# EAGLE board stm32f103c8t6_tft_mcp6s92 (EAGLE 9.3.0)
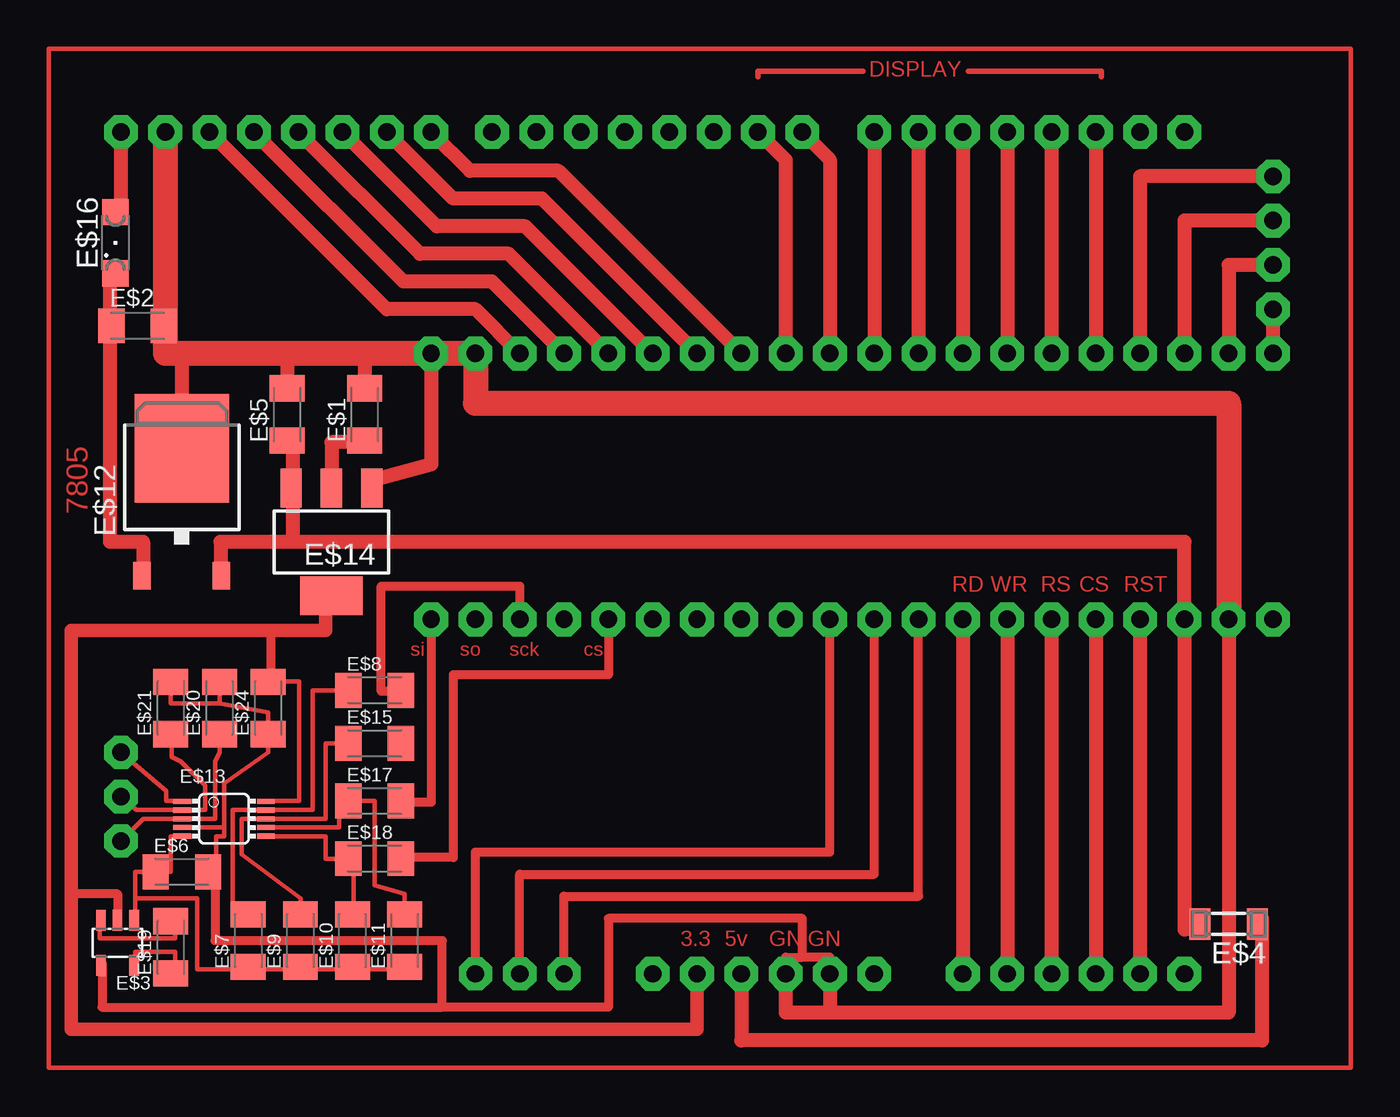
[diagram p0: board, top side]
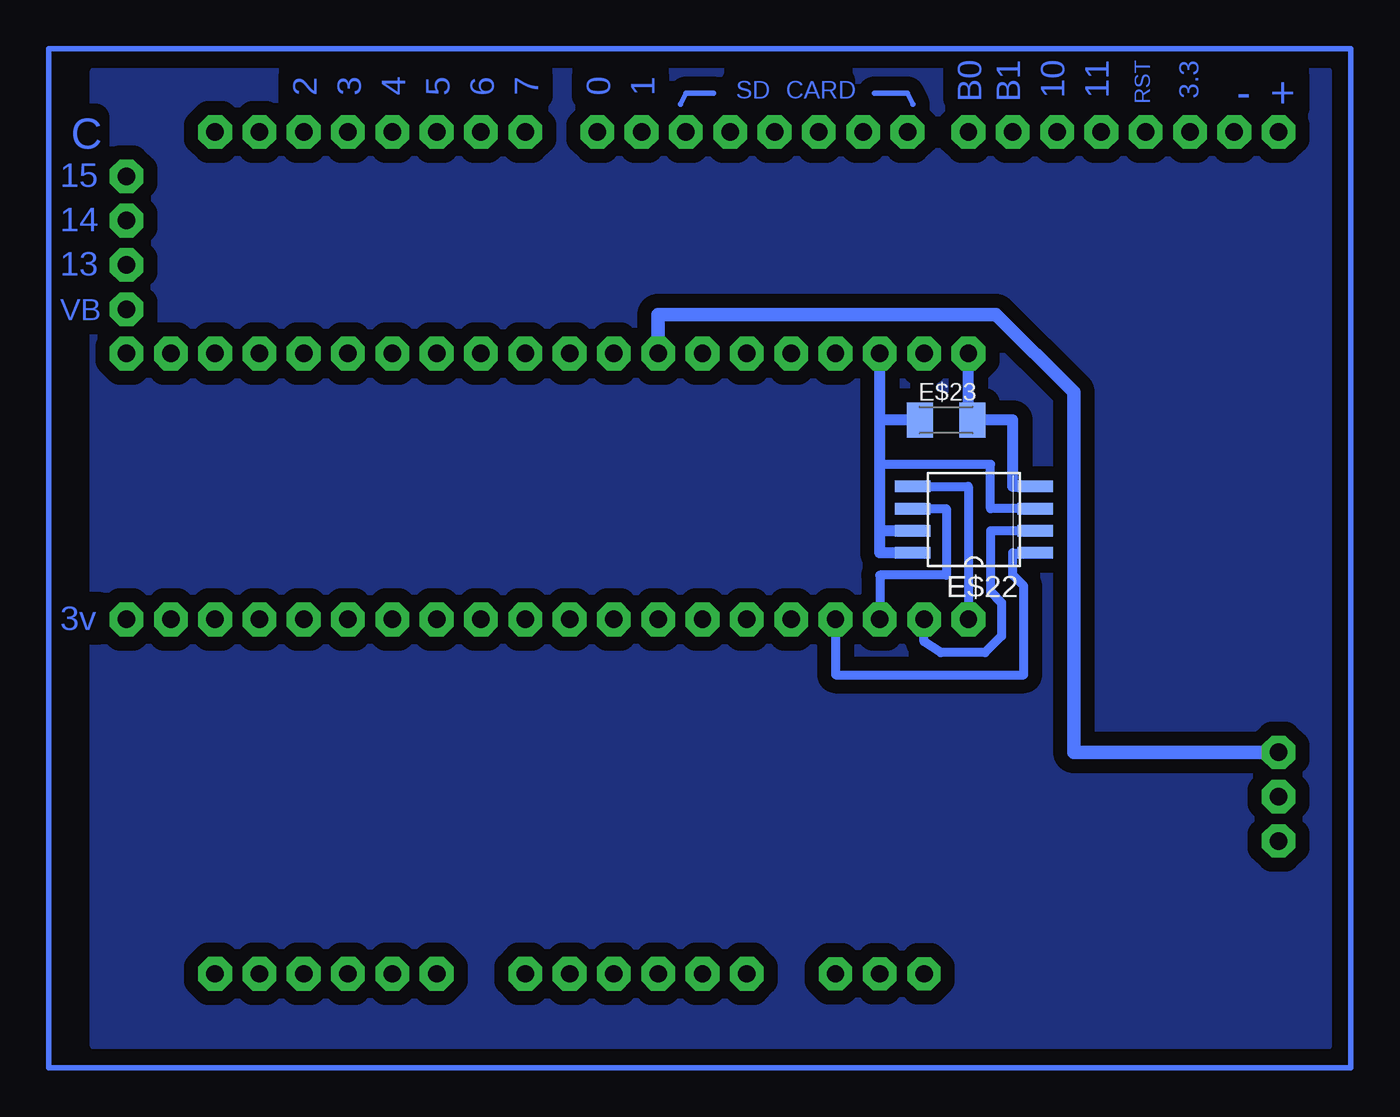
[diagram p1: board, bottom side, seen from below]

No outline drawn. Coordinates in mm, seen from the top.
Copper layers (1*16): Top 0.035mm / dielectric 1.5mm / Bottom 0.035mm
Design rules "default": minimum track width 10mil, minimum drill 24mil, track to track 8mil, track to pad 8mil, pad to pad 8mil, via to via 8mil, smd to smd 8mil, copper to edge 40mil, drill to drill 8mil, minimum pad ring 10mil, minimum via ring 8mil, stop-mask expansion 4mil, vias tented up to drill 0mil, thermal gap 10mil

## Footprints (pad centres in the part's own frame; a part is rotated, then mirrored left to right if it is on the bottom)
C1206K = smd 1.5 x 2: 1 -1.5,0; 2 1.5,0
SOT23-5 = smd 0.55 x 1.2: 1 -0.95,-1.3; 2 0,-1.3; 3 0.95,-1.3; 4 0.95,1.3; 5 -0.95,1.3
SM-1206 = smd 1.2 x 1.8: 1 -1.65,0; 2 1.65,0
TO252 = smd 1 x 1.6: 1 -2.28,-4.8; 2 2.28,-4.8 | smd 5.4 x 6.2: 3 0,2.5
MSOP10 = smd 0.3 x 1.02: 1 -1,-2.4; 2 -0.5,-2.4; 3 0,-2.4; 4 0.5,-2.4; 5 1,-2.4; 6 1,2.4; 7 0.5,2.4; 8 0,2.4; 9 -0.5,2.4; 10 -1,2.4
SOT223 = smd 1.219 x 2.235: 1 -2.311,-3.099; 2 0,-3.099; 3 2.311,-3.099 | smd 3.6 x 2.2: 4 0,3.099
SML1206 = smd 1.5 x 1.5: A 1.75,0; C -1.75,0
SO08-208 = smd 0.66 x 2.032: 1 -1.905,-3.498; 2 -0.635,-3.498; 3 0.635,-3.498; 4 1.905,-3.498; 5 1.905,3.498; 6 0.635,3.498; 7 -0.635,3.498; 8 -1.905,3.498

## Placement (x,y rotation side)
E$1  [C1206K]  18.41,37.78 90 top
E$2  [C1206K]  5.4,42.86 0 top
E$3  tps60  [SOT23-5]  4.25,7.49 180 top
E$4  [SM-1206]  67.94,8.57 180 top
E$5  [C1206K]  13.97,37.78 90 top
E$6  1m  [C1206K]  7.94,11.56 0 top
E$7  3k  [C1206K]  11.75,7.62 90 top
E$8  1k  [C1206K]  18.99,21.97 0 top
E$9  3k  [C1206K]  14.73,7.62 90 top
E$10  3k  [C1206K]  17.72,7.62 90 top
E$11  3k  [C1206K]  20.7,7.62 90 top
E$12  [TO252]  7.94,33.34 0 top
E$13  mcp6s93  [MSOP10]  10.35,14.61 270 top
E$14  [SOT223]  16.51,30.48 180 top
E$15  1k  [C1206K]  18.99,18.92 0 top
E$16  [SML1206]  4.13,47.62 90 top
E$17  1k  [C1206K]  18.99,15.62 0 top
E$18  1k  [C1206K]  18.99,12.32 0 top
E$19  1m  [C1206K]  7.3,7.24 90 top
E$20  4k7  [C1206K]  10.1,20.95 90 top
E$21  470k  [C1206K]  7.3,20.95 90 top
E$22  [SO08-208]  21.91,31.75 90 bottom
E$23  [C1206K]  23.5,37.47 0 bottom
E$24  1m  [C1206K]  12.89,20.95 90 top

## Library data of the parts
E$1 E$2 E$5 E$12 = adafruit
E$3 = v-reg-micrel
E$4 = inductor-neosid
E$6-E$11 E$15 E$17-E$21 E$24 = rcl
E$13 = linear
E$14 = transistor-pnp
E$16 = led
E$22 = maxim
E$23 = ref-packages-longpad

## Tracks (layer width: path | path; a pad name or v marks a point on that pad's centre or on a via)
S$1  (via drill 1 pad 1.93)
  Top 0.813: v60.33,53.98 v60.33,41.27
S$2  (via drill 1 pad 1.93)
  Top 0.813: v57.78,53.98 v57.78,41.27
S$3  (via drill 1 pad 1.93)
  Top 0.813: v55.24,53.98 v55.24,41.27
S$4  (via drill 1 pad 1.93)
  Top 0.813: v50.16,53.98 v50.16,41.27
S$5  (via drill 1 pad 1.93)
  Top 0.813: v47.62,53.98 v47.62,41.27
S$6  (via drill 1 pad 1.93)
  Top 0.813: v45.09,41.27 45.09,52.39 v43.5,53.98
S$7
  Top 0.813: 62.87,26.04 62.87,5.71
S$8
  Top 0.813: 60.33,26.04 60.33,5.71
S$9
  Top 0.813: 57.78,26.04 57.78,5.71
S$10
  Top 0.813: 55.24,26.04 55.24,5.71
S$11
  Top 0.813: 52.7,26.04 52.7,5.71
S$12  (via drill 1 pad 1.93)
  Top 0.508: 13.02,25.4 13.02,22.86
  Top 0.762: v37.47,5.71 37.47,2.54 1.59,2.54 1.59,25.4 13.02,25.4 16.19,25.4 16.19,27.94
S$13
  Top 0.813: 3.81,45.72 3.81,30.48 5.71,30.48 5.71,28.26
S$14  (via drill 1 pad 1.93)
  Top 0.813: v42.55,41.27 42.55,52.39 v40.96,53.98
S$15  (via drill 1 pad 1.93)
  other vias: 65.41,53.98
S$16
  Top 0.813: 16.51,33.66 16.51,36.2 18.41,36.2
S$17
  Top 0.25: 14.67,22.48 14.67,15.62 12.64,15.62
  Top 0.254: 12.89,22.23 12.89,22.48 14.67,22.48
S$18
  Bottom 0.305: 27.62,56.2 25.72,56.2 25.4,55.56
S$19
  Top 0.813: 7.94,41.27 7.94,36.51
S$20
  Bottom 0.305: 36.83,56.2 38.42,56.2 38.73,55.56
S$21  (via drill 1 pad 1.93)
  Top 0.813: v52.7,53.98 v52.7,41.27
S$22  (via drill 1 pad 1.93)
  Top 0.813: v12.06,53.98 20.64,45.4 25.72,45.4 v29.84,41.27
S$23  (via drill 1 pad 1.93)
  Top 0.813: v14.61,53.98 21.59,46.99 26.67,46.99 v32.38,41.27
S$24
  pour Bottom (isolate 0.813): 1.59,1.59 72.39,1.59 72.39,57.47 1.59,57.47
S$25  (via drill 1 pad 1.93)
  Top 0.813: 66.36,8.26 65.41,8.26 v65.41,26.04 65.41,30.48 14.29,30.48 | 14.29,36.2 14.29,30.48 | 14.29,30.48 10.16,30.48 10.16,28.26
S$26
  Bottom 0.305: 74.93,58.74 74.93,0.32 0.32,0.32 0.32,58.74 74.93,58.74
S$27  (via drill 1 pad 1.93)
  Top 0.813: v27.3,41.27 24.77,43.81 19.68,43.81 v9.53,53.98
  Bottom 0.508: 27.3,34.92 20.95,34.92 20.95,32.38 17.78,32.38
  Bottom 0.635: 25.08,29.84 27.3,29.84 27.3,31.11 | 25.08,31.11 27.3,31.11 | 27.3,31.11 27.3,34.92 27.3,37.47 | 27.3,37.47 v27.3,41.27 | 24.77,37.47 27.3,37.47
S$28  (via drill 1 pad 1.9)
  Top 0.254: 7.37,19.49 7.37,18.16 7.87,17.91 9.27,16.51 9.27,15.11 5.33,15.11 v4.45,15.88
S$29  (via drill 1 pad 1.93)
  Top 0.508: 9.84,11.43 9.84,7.62 22.86,7.62 22.86,3.81 | v45.09,5.71 45.09,6.67 43.5,6.67 | v42.55,5.71 42.55,6.67 43.5,6.67 | 43.5,6.67 43.5,8.89 32.38,8.89 32.38,3.81 22.86,3.81 | 3.37,6.35 3.37,3.81 22.86,3.81
  Top 0.813: 18.73,33.02 18.73,33.97 22.23,34.92 v22.23,41.27 | v67.94,26.04 67.94,3.49 45.09,3.49 | v45.09,5.71 45.09,3.49 | 45.09,3.49 42.55,3.49 v42.55,5.71 | 13.97,41.27 13.97,39.05 | 18.41,41.27 18.41,39.05
  Top 1.422: v67.94,26.04 67.94,38.42 24.77,38.42 v24.77,41.27 v22.23,41.27 18.41,41.27 13.97,41.27 6.99,41.27 v6.99,53.98
  Bottom 0.635: 18.1,33.66 19.68,33.66 19.68,37.47 22.23,37.47 v22.23,41.27
S$30
  Top 0.254: 16.7,21.97 15.43,21.97 15.43,15.11 10.86,15.11 10.86,8.76
S$31
  Top 0.254: 14.73,8.83 14.73,10.03 11.37,12.57 11.37,14.61 16.19,14.61 16.19,18.92 16.7,18.92
S$32
  Top 0.254: 20.7,8.83 20.7,10.29 18.99,10.79 18.99,15.62 16.95,15.62 16.95,14.1 12.64,14.1
S$33
  Top 0.305: 40.96,57.15 40.96,57.47 46.99,57.47
S$34  (via drill 1 pad 1.93)
  Top 0.813: v4.45,53.98 4.45,49.53
S$35
  Top 0.305: 53.02,57.47 60.64,57.47 60.64,57.15
S$36
  Top 0.254: 7.56,8.26 7.56,7.75 3.24,7.75 3.24,9.02
S$37
  Top 0.254: 5.27,6.22 5.27,6.99 7.56,6.99 7.56,5.46
S$39  (via drill 1 pad 1.93)
  Bottom 0.508: v29.84,26.04 29.84,22.86 19.05,22.86 19.05,27.94 19.68,28.57 19.68,29.84 17.78,29.84
S$40  (via drill 1 pad 1.93)
  Top 0.508: v22.23,26.04 22.23,15.56 20.32,15.56
  Bottom 0.508: 26.04,33.66 22.23,33.66 v22.23,26.04
S$41  (via drill 1 pad 1.93)
  Top 0.508: 20.64,21.91 19.37,21.91 19.37,27.94 27.3,27.94 v27.3,26.04
  Bottom 0.508: 26.04,32.38 23.5,32.38 23.5,28.57 27.3,28.57 v27.3,26.04
S$42
  Top 0.254: 7.81,13.59 7.3,13.59 7.3,11.56 5.27,11.56 5.27,10.03 | 21.21,5.97 8.83,5.97 8.83,10.03 5.27,10.03 | 5.27,10.03 5.27,9.02
S$43
  Top 0.254: 74.93,0.32 0.32,0.32 0.32,58.74 74.93,58.74 74.93,0.32
S$44  (via drill 1 pad 1.9, 1 pad 1.93)
  Top 0.508: v29.84,5.71 29.84,10.16 50.16,10.16 v50.16,26.04
S$45
  Top 0.254: 8.32,15.62 7.05,15.62 7.05,16.19 4.38,18.48
S$46
  Top 0.254: 12.64,13.59 16.19,13.59 16.19,12.32 17.78,12.32 17.78,8.76
S$47  (via drill 1 pad 1.9, 1 pad 1.93)
  Top 0.508: v27.3,5.71 27.3,11.43 47.62,11.43 v47.62,26.04
S$48  (via drill 1 pad 1.93)
  other vias: 37.47,26.04
S$49  (via drill 1 pad 1.93)
  Top 0.813: v17.14,53.98 22.54,48.58 27.62,48.58 v34.92,41.27
S$50  (via drill 1 pad 1.93)
  Top 0.813: v19.68,53.98 23.5,50.16 28.57,50.16 v37.47,41.27
S$51  (via drill 1 pad 1.9, 1 pad 1.93)
  Top 0.813: v22.23,53.98 24.45,51.75 29.53,51.75 v40.01,41.27
  Bottom 0.762: v40.01,41.27 40.01,43.5 20.64,43.5 16.19,39.05 16.19,18.41 v4.45,18.41
S$52  (via drill 1 pad 1.93)
  other vias: 25.72,53.98
S$53  (via drill 1 pad 1.93)
  other vias: 28.26,53.98
S$54  (via drill 1 pad 1.93)
  other vias: 30.8,53.98
S$55  (via drill 1 pad 1.93)
  other vias: 33.34,53.98
S$56  (via drill 1 pad 1.93)
  other vias: 35.88,53.98
S$57  (via drill 1 pad 1.93)
  other vias: 38.42,53.98
S$58  (via drill 1 pad 1.93)
  Top 0.508: v32.38,26.04 32.38,22.86 23.5,22.86 23.5,12.38 20.32,12.38
S$59  (via drill 1 pad 1.93)
  Bottom 0.508: 17.78,31.11 20.95,31.11 20.95,27.62 20.32,26.99 20.32,25.08 21.27,24.13 23.81,24.13 24.77,24.77 v24.77,26.04
S$60  (via drill 1 pad 1.9, 1 pad 1.93)
  Top 0.508: v24.77,5.71 24.77,12.7 45.09,12.7 v45.09,26.04
S$61
  Top 0.254: 7.3,22.48 7.3,21.21 10.1,21.21 | 10.1,22.48 10.1,21.21 | 10.1,21.21 12.89,20.7 12.89,18.41 10.35,16.64 10.35,14.1 | 10.35,14.1 7.81,14.1 | 10.35,14.1 10.35,13.59 9.91,13.59 9.91,10.99
S$64
  Top 0.508: 1.71,10.29 4.25,10.29 4.25,8.76
S$66  (via drill 1 pad 1.93)
  other vias: 62.87,53.98
S$67  (via drill 1 pad 1.93)
  Top 0.813: v40.01,5.71 40.01,1.91 69.85,1.91 69.85,8.89
S$68  (via drill 1 pad 1.9)
  Top 0.254: 10.1,19.68 10.1,18.41 9.84,17.91 9.84,14.61 8.26,14.61 8,14.61 5.71,14.61 v4.45,13.34
S$70  (via drill 1 pad 1.93)
  Top 0.813: v70.48,43.81 v70.48,41.27
S$85  (via drill 1 pad 1.93)
  Top 0.813: v62.87,41.27 62.87,51.44 v70.48,51.44
S$86  (via drill 1 pad 1.93)
  Top 0.813: v65.41,41.27 65.41,48.9 v70.48,48.9
S$87  (via drill 1 pad 1.93)
  Top 0.813: v67.94,41.27 67.94,46.35 v70.48,46.35
S$101  (via drill 1 pad 1.93)
  other vias: 52.7,26.04
S$102  (via drill 1 pad 1.93)
  other vias: 55.24,26.04
S$103  (via drill 1 pad 1.93)
  other vias: 57.78,26.04
S$104  (via drill 1 pad 1.93)
  other vias: 60.33,26.04
S$105  (via drill 1 pad 1.93)
  other vias: 62.87,26.04
S$108  (via drill 1 pad 1.93)
  other vias: 55.24,5.71
S$109  (via drill 1 pad 1.93)
  other vias: 65.41,5.71
S$110  (via drill 1 pad 1.93)
  other vias: 62.87,5.71
S$111  (via drill 1 pad 1.93)
  other vias: 60.33,5.71
S$112  (via drill 1 pad 1.93)
  other vias: 57.78,5.71
S$113  (via drill 1 pad 1.93)
  other vias: 52.7,5.71
S$114  (via drill 1 pad 1.93)
  other vias: 47.62,5.71
S$115  (via drill 1 pad 1.93)
  other vias: 42.55,26.04
S$118  (via drill 1 pad 1.93)
  other vias: 34.92,5.71
S$127  (via drill 1 pad 1.93)
  other vias: 34.92,26.04
S$129  (via drill 1 pad 1.93)
  other vias: 40.01,26.04
S$131  (via drill 1 pad 1.93)
  other vias: 70.48,26.04

## Text on the board
Top: DISPLAY | 7805 | RD | WR | RS | CS | RST | si | so | sck | cs | 3.3 | 5v | GN | GN
Bottom: 3.3 | RST | 11 | 10 | B1 | B0 | + | - | 1 | 0 | 7 | 6 | 5 | 4 | 3 | 2 | CARD | SD | C | 15 | 14 | 13 | VB | 3v